# EAGLE board openSX70_SCHEMATIC_COMPLETE (EAGLE 8.4.3)
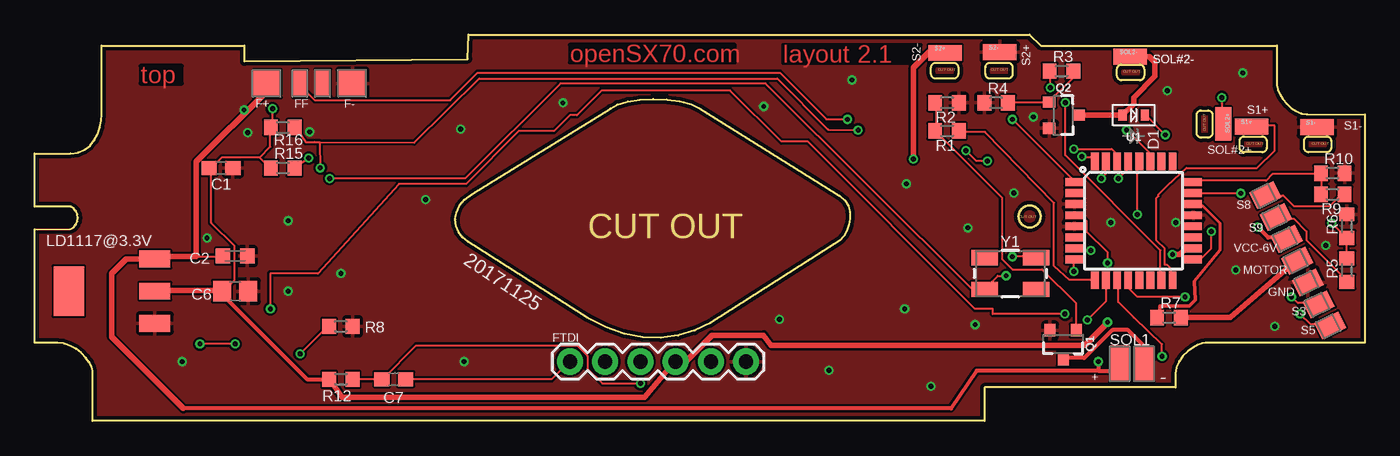
[diagram p0: board, top side]
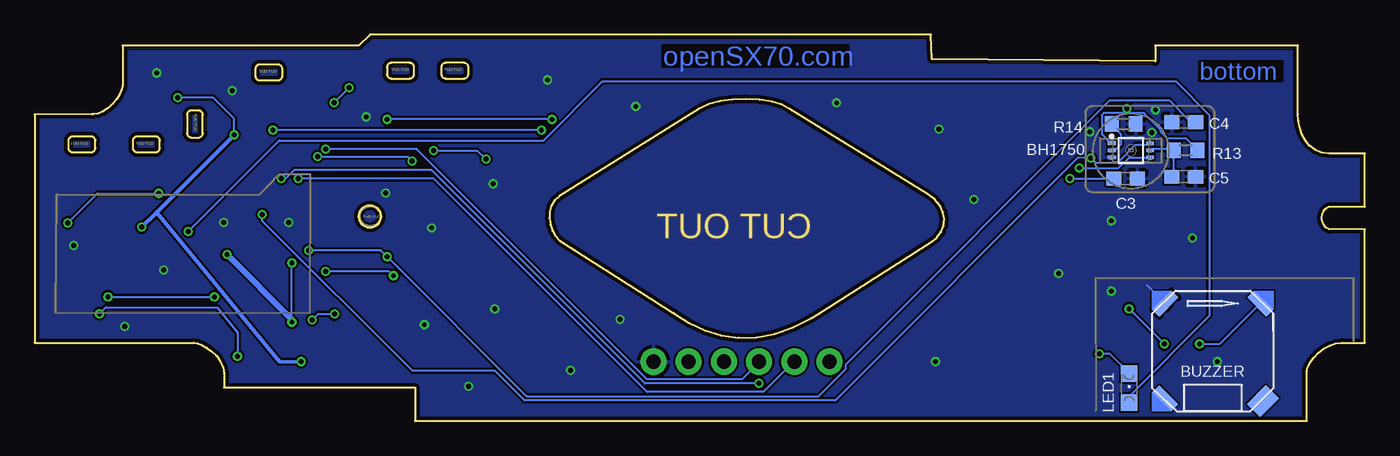
[diagram p1: board, bottom side, seen from below]

Size 95.88 x 27.86 mm. Coordinates in mm from the lower left corner, seen from the top.
Outline: 71.72,15.54 71.88,15.53 72.03,15.48 72.17,15.41 72.29,15.31
Outline: 72.29,15.31 72.39,15.19 72.46,15.06 72.51,14.91 72.52,14.74
Outline: 72.52,14.74 72.51,14.58 72.46,14.43 72.39,14.3 72.29,14.18
Outline: 72.29,14.18 72.17,14.08 72.03,14.01 71.88,13.96 71.72,13.94
Outline: 71.72,13.94 71.56,13.96 71.41,14.01 71.28,14.08 71.16,14.18
Outline: 71.16,14.18 71.06,14.3 70.99,14.43 70.94,14.58 70.92,14.74
Outline: 70.92,14.74 70.94,14.91 70.99,15.06 71.06,15.19 71.16,15.31
Outline: 71.16,15.31 71.28,15.41 71.41,15.48 71.56,15.53 71.72,15.54
Outline: 71.72,15.54 71.57,15.53 71.42,15.48 71.28,15.41 71.16,15.31
Outline: 71.16,15.31 71.06,15.19 70.98,15.05 70.94,14.9 70.92,14.74
Outline: 70.92,14.74 70.94,14.59 70.98,14.44 71.06,14.3 71.16,14.18
Outline: 71.16,14.18 71.28,14.08 71.42,14.01 71.57,13.96 71.72,13.94
Outline: 71.72,13.94 71.88,13.96 72.03,14.01 72.17,14.08 72.29,14.18
Outline: 72.29,14.18 72.39,14.3 72.46,14.44 72.51,14.59 72.52,14.74
Outline: 72.52,14.74 72.51,14.9 72.46,15.05 72.39,15.19 72.29,15.31
Outline: 72.29,15.31 72.17,15.41 72.03,15.48 71.88,15.53 71.72,15.54
Outline: 91.7,22.11 91.77,22.11 95.88,22.11 95.88,5.64 84.4,5.64 84.15,5.6 83.83,5.47 83.48,5.27 83.11,5.01 82.78,4.68 82.5,4.3 82.31,3.87 82.24,3.4 82.24,2.41 68.47,2.41 68.47,0 4.17,0 4.17,3.6 4.11,3.9 3.94,4.23 3.69,4.56 3.36,4.89 2.98,5.18 2.56,5.42 2.11,5.58 1.66,5.64 0,5.64 0,13.82 2.59,13.84 2.81,13.96 2.98,14.15 3.07,14.39 3.1,14.65 3.07,14.91 2.97,15.15 2.81,15.34 2.59,15.45 0,15.46 0,19.29 2.59,19.29 3.14,19.36 3.6,19.56 3.99,19.87 4.3,20.26 4.53,20.7 4.7,21.17 4.79,21.65 4.82,22.11 4.82,27.07 15.1,27.07 15.1,25.94 31.21,26.11 31.28,27.86 71.71,27.86 72.52,27.07 89.55,27.07 89.55,24.21 89.61,23.9 89.76,23.56 89.97,23.21 90.25,22.87 90.57,22.57 90.93,22.33 91.31,22.17 91.7,22.11
Outline: 83.76,20.77 83.76,22.06 83.77,22.12 83.79,22.19 83.82,22.24 83.86,22.29 83.91,22.33 83.96,22.36 84.03,22.38 84.09,22.39 84.57,22.39 84.64,22.38 84.7,22.36 84.76,22.33 84.81,22.29 84.85,22.24 84.88,22.19 84.9,22.12 84.9,22.06 84.9,20.77 84.9,20.7 84.88,20.64 84.85,20.58 84.81,20.53 84.76,20.49 84.7,20.46 84.64,20.44 84.57,20.44 84.09,20.44 84.03,20.44 83.96,20.46 83.91,20.49 83.86,20.53 83.82,20.58 83.79,20.64 83.77,20.7 83.76,20.77
Outline: 87.19,20.53 88.48,20.53 88.54,20.52 88.61,20.5 88.66,20.47 88.71,20.43 88.75,20.38 88.78,20.32 88.8,20.26 88.81,20.19 88.81,19.71 88.8,19.65 88.78,19.59 88.75,19.53 88.71,19.48 88.66,19.44 88.61,19.41 88.54,19.39 88.48,19.38 87.19,19.38 87.12,19.39 87.06,19.41 87,19.44 86.95,19.48 86.91,19.53 86.88,19.59 86.86,19.65 86.86,19.71 86.86,20.19 86.86,20.26 86.88,20.32 86.91,20.38 86.95,20.43 87,20.47 87.06,20.5 87.12,20.52 87.19,20.53
Outline: 91.84,20.53 93.13,20.53 93.2,20.52 93.26,20.5 93.32,20.47 93.37,20.43 93.41,20.38 93.44,20.32 93.46,20.26 93.46,20.19 93.46,19.71 93.46,19.65 93.44,19.59 93.41,19.53 93.37,19.48 93.32,19.44 93.26,19.41 93.2,19.39 93.13,19.38 91.84,19.38 91.78,19.39 91.71,19.41 91.66,19.44 91.61,19.48 91.57,19.53 91.54,19.59 91.52,19.65 91.51,19.71 91.51,20.19 91.52,20.26 91.54,20.32 91.57,20.38 91.61,20.43 91.66,20.47 91.71,20.5 91.78,20.52 91.84,20.53
Outline: 78.36,25.71 79.65,25.71 79.71,25.7 79.78,25.68 79.83,25.65 79.88,25.61 79.92,25.56 79.95,25.5 79.97,25.44 79.98,25.37 79.98,24.9 79.97,24.83 79.95,24.77 79.92,24.71 79.88,24.66 79.83,24.62 79.78,24.59 79.71,24.57 79.65,24.56 78.36,24.56 78.29,24.57 78.23,24.59 78.17,24.62 78.12,24.66 78.08,24.71 78.05,24.77 78.03,24.83 78.02,24.9 78.02,25.37 78.03,25.44 78.05,25.5 78.08,25.56 78.12,25.61 78.17,25.65 78.23,25.68 78.29,25.7 78.36,25.71
Outline: 68.87,25.84 70.16,25.84 70.23,25.83 70.29,25.81 70.35,25.78 70.39,25.74 70.43,25.69 70.47,25.63 70.49,25.57 70.49,25.51 70.49,25.03 70.49,24.96 70.47,24.9 70.43,24.84 70.39,24.79 70.35,24.75 70.29,24.72 70.23,24.7 70.16,24.69 68.87,24.69 68.8,24.7 68.74,24.72 68.68,24.75 68.64,24.79 68.59,24.84 68.56,24.9 68.54,24.96 68.54,25.03 68.54,25.51 68.54,25.57 68.56,25.63 68.59,25.69 68.64,25.74 68.68,25.78 68.74,25.81 68.8,25.83 68.87,25.84
Outline: 64.95,25.84 66.24,25.84 66.31,25.83 66.37,25.81 66.43,25.78 66.48,25.74 66.52,25.69 66.55,25.63 66.57,25.57 66.57,25.51 66.57,25.03 66.57,24.96 66.55,24.9 66.52,24.84 66.48,24.79 66.43,24.75 66.37,24.72 66.31,24.7 66.24,24.69 64.95,24.69 64.88,24.7 64.82,24.72 64.77,24.75 64.72,24.79 64.68,24.84 64.65,24.9 64.63,24.96 64.62,25.03 64.62,25.51 64.63,25.57 64.65,25.63 64.68,25.69 64.72,25.74 64.77,25.78 64.82,25.81 64.88,25.83 64.95,25.84
Outline: 31.52,16.35 41.5,22.53 42.01,22.82 42.74,23.03 43.62,23.16 44.59,23.21 45.57,23.18 46.5,23.06 47.32,22.84 47.95,22.53 58.05,16.23 58.41,15.9 58.64,15.51 58.76,15.07 58.78,14.61 58.71,14.16 58.56,13.73 58.34,13.34 58.06,13.03 49.78,7.77 48.71,7.05 47.57,6.51 46.38,6.16 45.13,5.99 43.84,6.03 42.53,6.28 41.2,6.75 39.87,7.45 31.22,12.93 30.83,13.23 30.55,13.62 30.37,14.06 30.32,14.55 30.4,15.04 30.62,15.52 30.99,15.97 31.52,16.35
Copper layers (1*16): Top 0.035mm / dielectric 1.5mm / Bottom 0.035mm
Design rules "SeeedStudio_2layer_DRU_no_angle_20140221": minimum track width 6mil, minimum drill 12mil, track to track 6mil, track to pad 6mil, pad to pad 6mil, via to via 6mil, smd to smd 0mil, copper to edge 10mil, drill to drill 10mil, minimum pad ring 10mil, minimum via ring 6mil, stop-mask expansion 2mil, vias tented up to drill 100mil, thermal gap 10mil

## Footprints (pad centres in the part's own frame; a part is rotated, then mirrored left to right if it is on the bottom)
SOTFL50P300X75-6N = smd 0.55 x 0.3: 1 -1.375,0.525 | smd 0.55 x 0.25: 2 -1.375,0; 3 -1.375,-0.5; 4 1.375,-0.5; 5 1.375,0; 6 1.375,0.5
CSET8-5G_PACKAGE = smd 1.9 x 0.7 rotated 225: + 3.054,-3.114 | smd 1.9 x 0.7 rotated 45: DUMMY1 -3.786,3.746 | smd 1.9 x 1.3 rotated 135: DUMMY2 -3.99,-3.29 | smd 1.9 x 0.7 rotated 315: GND- 3.051,3.742
0603 = smd 1.1 x 1: 1 -0.85,0; 2 0.85,0
C0603K = smd 1.05 x 1.08: 1 -0.875,0; 2 0.875,0
C0805 = smd 1.3 x 1.5: 1 -0.95,0; 2 0.95,0
SOD-523 = smd 0.8 x 0.6: A 0,-0.8; K 0,0.8
1X06 = drill 1.016 pad 1.88: 1 0,0; 2 2.54,0; 3 5.08,0; 4 7.62,0; 5 10.16,0; 6 12.7,0
SOT223 = smd 2.235 x 1.219: 1 -3.099,2.311; 2 -3.099,0; 3 -3.099,-2.311 | smd 2.2 x 3.6: 4 3.099,0
CHIPLED_0805 = smd 1.2 x 1.2: A 0,-1.05; C 0,1.05
SOT23-3 = smd 0.8 x 0.9: 1 -0.95,-1; 2 0.95,-1; 3 0,1.1
R0603 = smd 1 x 1.1: 1 -0.85,0; 2 0.85,0
SX70-S-PAD2 = smd 2.413 x 1.143: P$1 0.01,0.087
SX70-SOLENOID1-2 = smd 1.372 x 2.54: SOL1+ -0.826,0.127; SOL1- 0.953,0.127
TQFP32-08 = smd 1.27 x 0.559: 1 -4.293,2.8; 2 -4.293,2; 3 -4.293,1.2; 4 -4.293,0.4; 5 -4.293,-0.4; 6 -4.293,-1.2; 7 -4.293,-2; 8 -4.293,-2.8; 17 4.293,-2.8; 18 4.293,-2; 19 4.293,-1.2; 20 4.293,-0.4; 21 4.293,0.4; 22 4.293,1.2; 23 4.293,2; 24 4.293,2.8 | smd 0.559 x 1.27: 9 -2.8,-4.293; 10 -2,-4.293; 11 -1.2,-4.293; 12 -0.4,-4.293; 13 0.4,-4.293; 14 1.2,-4.293; 15 2,-4.293; 16 2.8,-4.293; 25 2.8,4.293; 26 2,4.293; 27 1.2,4.293; 28 0.4,4.293; 29 -0.4,4.293; 30 -1.2,4.293; 31 -2,4.293; 32 -2.8,4.293
SX70-7-PAD = smd 1.31 x 1.93 rotated 296: GND 3.404,0.495; MOTOR+ 2.654,2.07; S3 4.204,-1.067; S5 5.016,-2.591; S8 0.356,6.807; S9 1.118,5.232; VCC-6V 1.88,3.658
FFA-PAD-PACKAGE = smd 1.95 x 1.95: F+ -3.277,-0.013; F- 2.87,0 | smd 1.05 x 1.95: FF -0.914,0; FT 0.737,0.025
CRYSTAL-SMD-5X3.2-4PAD = smd 1.9 x 1.1: 1 -1.85,-1.15; 2 1.85,-1.15; 3 1.85,1.15; 4 -1.85,1.15

## Placement (x,y rotation side)
BH1750  BH1750FVI-TR  [SOTFL50P300X75-6N]  16.86,19.52 0 bottom
BUZZER  CSET8-5G  [CSET8-5G_PACKAGE]  10.64,5.42 90 bottom
C1  10uF  [0603]  13.44,18.25 180 top
C2  100nF  [C0603K]  14.45,11.9 180 top
C3  22pF  [0603]  17.25,17.48 180 bottom
C4  22pF  [0603]  13.05,21.55 0 bottom
C5  10uF  [0603]  13.05,17.61 0 bottom
C6  100nF  [C0805]  14.45,9.36 0 top
C7  0.1uF  [0603]  25.88,3.01 180 top
D1  [SOD-523]  79.22,22.06 270 top
FTDI  FTDI HEADER  [1X06]  38.58,4.28 0 top
LD11173.3V  LD1117 3.3V  [SOT223]  5.56,9.36 180 top
LED1  [CHIPLED_0805]  16.99,2.37 0 bottom
Q1  5.8A/30V/35mΩ  [SOT23-3]  74.14,5.55 180 top
Q2  5.8A/30V/35mΩ  [SOT23-3]  74.14,22.06 270 top
R1  100R  [R0603]  65.76,20.91 180 top
R2  100K  [R0603]  65.76,22.94 180 top
R3  100R  [R0603]  74.01,25.23 0 top
R4  100K  [R0603]  69.32,22.94 0 top
R5  12K  [R0603]  94.59,10.88 90 top
R6  15K  [R0603]  94.59,14.05 90 top
R7  100R  [R0603]  81.76,7.45 0 top
R8  470R  [R0603]  22.07,6.82 180 top
R9  12K  [R0603]  93.57,16.34 180 top
R10  15K  [R0603]  93.57,17.86 0 top
R12  10K  [R0603]  22.07,3.01 180 top
R13  1K  [R0603]  12.93,19.52 0 bottom
R14  4K7  [R0603]  17.37,21.42 0 bottom
R15  4K7  [R0603]  17.88,18.25 0 top
R16  4K7  [R0603]  17.88,21.17 0 top
S1+  SX70-S-PAD-NEW  [SX70-S-PAD2]  87.72,21.14 0 top
S1-  SX70-S-PAD-NEW  [SX70-S-PAD2]  92.42,21.09 0 top
S2+  SX70-S-PAD-NEW  [SX70-S-PAD2]  65.62,26.46 0 top
S2-  SX70-S-PAD-NEW  [SX70-S-PAD2]  69.56,26.51 0 top
SOL1  SX70-SOLENOID1-2PADS  [SX70-SOLENOID1-2]  79.03,4.05 0 top
SOL2+  SX70-S-PAD-NEW  [SX70-S-PAD2]  85.59,21.43 270 top
SOL2-  SX70-S-PAD-NEW  [SX70-S-PAD2]  78.96,26.19 0 top
U1  ATMEGA328P_TQFP  [TQFP32-08]  79.22,14.44 0 top
U$1  SX70-7-PAD  [SX70-7-PAD]  88.37,9.48 0 top
U$2  [FFA-PAD-PACKAGE]  20.04,24.34 0 top
Y1  16MHz  [CRYSTAL-SMD-5X3.2-4PAD]  70.33,10.63 0 top

## Library data of the parts
BH1750 = openSX70; AVAILABILITY: Good; DESCRIPTION: Light to Digital Ambient Light Sensor Digital O/P 1lux to 65535lux 6-Pin WSOF Embossed T/R; MF: Rohm; MP: BH1750FVI-TR; PACKAGE: SMD-6 Rohm; PRICE: 2.38 USD
BUZZER = CSET8-5G_B
C1 C5 = SparkFun-Capacitors; PROD_ID: CAP-11015
C2 = rcl
C3 C4 = SparkFun-Capacitors; PROD_ID: CAP-07876
C6 R1-R10 R12-R16 = resistor
C7 = SparkFun-Capacitors; PROD_ID: CAP-00810
D1 = adafruit
FTDI = SparkFun-Connectors
LD11173.3V = openSX70; AVAILABILITY: Unavailable; DESCRIPTION: Sot223/Pkg 1-Amp 5-Volt Low Drop Out Voltage Regulatator; MF: Advanced Monolithic Systems; MP: AMS1117-5.0; PACKAGE: None; PRICE: None
LED1 = led
Q1 Q2 = openSX70; PROD_ID: TRANS-12988
S1+ S1- S2+ S2- SOL1 SOL2+ SOL2- U$1 U$2 = openSX70
U1 = openSX70; PROD_ID: IC-09069
Y1 = SparkFun-Clocks; PROD_ID: XTAL-08218; SF_ID: COM-00094

## Nets
3.3V: BH1750.1 C1.2 C6.1 FTDI.4 LD11173.3V.2 R12.2 R13.2 R15.1 R16.1 U1.4 U1.6 U1.18
6V: C2.2 D1.K LD11173.3V.3 SOL1.SOL1+ SOL2+.P$1 U$1.VCC-6V U$2.F+
BUZZER: BUZZER.+ U1.10
DTR: C7.1 FTDI.1
FF: U1.1 U$2.FF
GND: BH1750.3 BUZZER.GND- C1.1 C2.1 C3.1 C4.1 C5.2 C6.2 FTDI.6 LD11173.3V.1 Q1.2 Q2.2 R2.1 R4.1 R6.2 R8.1 R10.2 R14.2 S1-.P$1 S2-.P$1 U1.3 U1.5 U1.21 U$1.GND U$2.F-
LED: LED1.A U1.17
MOTOR+: R7.1 U1.22
MOTOR-HEADER: R7.2 U$1.MOTOR+
N$1: Q1.1 R1.2 R2.2
N$2: BH1750.5 C5.1 R13.1
N$3: Q2.1 R3.2 R4.2
N$4: C4.2 U1.7 Y1.3
N$5: LED1.C R8.2
N$6: C3.2 U1.8 Y1.1
N$9: C7.2 R12.1 U1.29
N$10: BH1750.2 R14.1
RXD: FTDI.3 U1.30
S1: S1+.P$1 U1.16
S2: S2+.P$1 U1.32
S3: U1.12 U$1.S3
S5: U1.11 U$1.S5
S8@3.3V: R9.2 R10.1 U1.24
S8@6V: R9.1 U$1.S8
S9@3.3V: R5.2 R6.1 U1.23
S9@6V: R5.1 U$1.S9
SCL: BH1750.6 R15.2 U1.28
SDA: BH1750.4 R16.2 U1.27
SOL1: R1.1 U1.9
SOL1-: Q1.3 SOL1.SOL1-
SOL2: R3.1 U1.15
SOL2-: D1.A Q2.3 SOL2-.P$1
TXD: FTDI.2 U1.31

## Tracks (layer width: path | path; a pad name or v marks a point on that pad's centre or on a via)
3.3V  (via drill 0.35)
  Top 0.152: 12.72,18.25 13.49,19.01 16.23,19.01 | 16.23,19.01 16.99,18.25 R15.1 | 16.23,19.01 16.99,19.77 16.99,21.14 R16.1 17.14,21.29 v17.14,22.51 | 13.38,9.25 C6.1 | 8.76,9.41 LD11173.3V.2 | 13.49,9.41 C6.1 | 12.72,18.25 12.72,14.28 14.4,12.61 14.4,10.17 13.64,9.41 C6.1 | 12.72,18.25 C1.2 | 75.82,13.67 75.51,13.37 75.06,13.37 U1.6 | 75.82,13.67 75.82,14.44 75.51,14.74 75.06,14.74 U1.4 | 82.83,12.3 83.44,12.3 U1.18 | 46.25,4.38 FTDI.4 46.1,4.22 | 75.82,13.67 77.34,12.15 v77.34,11.39 | 21.26,3.01 R12.2
  Top 0.305: R12.2 19.63,3.01 13.38,9.25 | 77.36,7.12 v77.34,7.12 | 46.25,4.38 47.01,4.38 | v82.02,11.99 v82.02,12
  Top 0.406: 13.49,9.41 8.76,9.41 | 82.83,12.3 82.52,12 v82.02,12 | 77.36,7.12 75.68,5.44 53.09,5.45 52.55,6.18 48.82,6.18 47.01,4.38 | 21.26,3.01 22.17,1.71 43.97,1.71 46.1,4.22
  Bottom 0.152: 17.14,22.21 15.92,22.21 14.71,20.99 14.71,20.84 14.25,20.38 12.88,20.38 12.11,19.62 R13.2 | 17.14,22.21 18.82,22.21 18.97,22.06 18.97,20.68 18.36,20.07 BH1750.1 | v17.14,22.51 17.14,22.21 | v77.34,7.12 v77.34,11.39
  Bottom 0.305: 77.34,7.32 v77.34,7.12
  Bottom 0.406: v82.02,12 77.34,7.32
6V  (via drill 0.35)
  Top 0.152: 11.66,11.84 13.49,11.84 C2.2 | 8.91,11.84 8.76,11.69 LD11173.3V.3 8.61,11.54 | 16.69,23.73 16.69,24.19 U$2.F+ | v81.51,20.63 80.09,22.06 D1.K | 90.14,13.22 U$1.VCC-6V | 78.26,4.22 SOL1.SOL1+ 78.1,4.07 77.65,3.62 | v85.57,23.33 85.57,21.53 SOL2+.P$1
  Top 0.305: v88.16,13.98 88.92,13.22 90.14,13.22 | 78.26,4.3 78.26,4.22 | 10.72,0.9 66.06,0.9 67.89,3.62 76.68,3.62 | 76.68,3.62 77.65,3.62 | v76.68,4.28 76.68,3.62
  Top 0.406: 8.91,11.84 11.66,11.84 11.66,18.7 16.69,23.73 | LD11173.3V.3 6.6,11.67 5.56,10.63 5.56,6.05 10.72,0.9
  Bottom 0.152: v81.51,20.63 81.51,21.8 83.03,23.33 v85.57,23.33
  Bottom 0.305: v88.16,13.98 87.1,15.05 | 87.1,15.05 v81.51,20.63 | 87.1,15.05 78.26,4.3 v76.68,4.28
BUZZER  (via drill 0.35)
  Top 0.152: U1.10 77.22,8.63 v75.88,7.28 | v74.27,7.7 69.06,7.7 69.06,8.09 67.79,8.09 55.73,20.15 53.82,20.15 50.14,23.83 40.87,23.83 39.09,22.06 38.58,22.06 37.44,20.91 34.9,20.91 31.09,17.1 26.26,17.1 20.42,10.63 16.99,10.63 v16.99,8.09 | v14.45,5.55 v11.91,5.55
  Bottom 0.152: v75.88,7.28 75.46,7.7 v74.27,7.7 | v11.91,5.55 10.45,5.55 BUZZER.+ | v16.99,8.09 v14.45,5.55
DTR
  Top 0.152: C7.1 37.26,3.01 38.48,4.22 FTDI.1
FF  (via drill 0.35)
  Top 0.152: v70.48,21.75 74.9,17.33 U1.1 | v58.6,21.75 57.07,21.75 53.72,25.1 31.93,25.1 29.95,23.12 20.19,23.12 19.13,24.19 U$2.FF
  Bottom 0.152: v58.6,21.75 v70.48,21.75
GND  (via drill 0.35)
  Bottom 0.152: BUZZER.GND- 14.4,8.49 15.7,9.8 14.3,8.39
  other vias: 10.64,4.28 22.07,10.63 62.71,8.09 53.69,7.32 30.71,21.04 62.84,17.1 28.17,15.96 30.96,4.28 57.25,3.64 67.79,6.94 86.59,10.88 87.1,25.1 93.06,12.66 81.63,23.83 58.9,24.6 38.07,22.94 52.55,22.69 77.57,14.31 71.98,21.93 18.26,9.36 82.27,14.31 15.34,20.79 15.09,22.44 19.82,20.85 89.38,6.82 64.62,2.5 18.26,14.44 70.59,16.44 12.42,13.2 67.28,13.93
  pour Top (isolate 0.152): 91.7,22.11 91.77,22.11 95.88,22.11 95.88,5.64 84.4,5.64 84.15,5.6 83.83,5.47 83.48,5.27 83.11,5.01 82.78,4.68 82.5,4.3 82.31,3.87 82.24,3.4 82.24,2.41 68.47,2.41 68.47,0 4.17,0 4.17,3.6 4.11,3.9 3.94,4.23 3.69,4.56 3.36,4.89 2.98,5.18 2.56,5.42 2.11,5.58 1.66,5.64 0,5.64 0,13.82 2.59,13.84 2.81,13.96 2.98,14.15 3.07,14.39 3.1,14.65 3.07,14.91 2.97,15.15 2.81,15.34 2.59,15.45 0,15.46 0,19.29 2.59,19.29 3.14,19.36 3.6,19.56 3.99,19.87 4.3,20.25 4.53,20.7 4.7,21.17 4.79,21.65 4.82,22.11 4.82,27.07 15.1,27.07 15.1,25.94 31.21,26.11 31.28,27.86 71.71,27.86 72.52,27.07 89.55,27.07 89.55,24.21 89.61,23.9 89.76,23.56 89.97,23.21 90.25,22.87 90.57,22.57 90.93,22.33 91.31,22.17
  pour Bottom (isolate 0.152): 91.7,22.11 91.77,22.11 95.88,22.11 95.88,5.64 84.4,5.64 84.15,5.6 83.83,5.47 83.48,5.27 83.11,5.01 82.78,4.68 82.5,4.3 82.31,3.87 82.24,3.4 82.24,2.41 68.47,2.41 68.47,0 4.17,0 4.17,3.6 4.11,3.9 3.94,4.23 3.69,4.56 3.36,4.89 2.98,5.18 2.56,5.42 2.11,5.58 1.66,5.64 0,5.64 0,13.82 2.59,13.84 2.81,13.96 2.98,14.15 3.07,14.39 3.1,14.65 3.07,14.91 2.97,15.15 2.81,15.34 2.59,15.45 0,15.46 0,19.29 2.59,19.29 3.14,19.36 3.6,19.56 3.99,19.87 4.3,20.25 4.53,20.7 4.7,21.17 4.79,21.65 4.82,22.11 4.82,27.07 15.1,27.07 15.1,25.94 31.21,26.11 31.28,27.86 71.71,27.86 72.52,27.07 89.55,27.07 89.55,24.21 89.61,23.9 89.76,23.56 89.97,23.21 90.25,22.87 90.57,22.57 90.93,22.33 91.31,22.17
LED  (via drill 0.35)
  Top 0.152: v84.81,13.67 84.81,12.45 84.05,11.69 83.59,11.69 U1.17
  Bottom 0.152: LED1.A 16.99,1.79 11.2,7.58 11.2,22.06 13.64,24.49 54.94,24.49 59.21,20.23 78.26,20.23 v84.81,13.67
MOTOR+
  Top 0.152: 84.2,15.5 83.59,15.5 U1.22 | 81.12,7.4 R7.1
  Top 0.203: 83.59,10.06 85.42,12.3 85.42,14.28 84.2,15.5
  Top 0.254: 83.59,10.06 83.67,8.72 83.23,8.28 81.09,8.28 81.12,7.4
MOTOR-HEADER
  Top 0.152: 90.91,11.54 U$1.MOTOR+
  Top 0.406: 90.91,11.54 86.18,7.45 R7.2
N$1
  Top 0.152: Q1.1 75.06,6.66 75.06,8.49 72.62,10.93 70.48,10.93 69.72,11.69 69.72,16.11 65,20.84 R1.2 65,20.99 65,22.82 R2.2
N$2
  Bottom 0.152: BH1750.5 15.47,19.62 13.79,19.62 R13.1 13.79,19.46 13.79,17.64 C5.1
N$3
  Top 0.152: R3.2 74.75,25.1 74.75,24.65 73.23,23.12 Q2.1 73.07,22.97 70.18,22.97 R4.2
N$4  (via drill 0.35)
  Top 0.152: v70.48,11.84 72.16,11.84 Y1.3 | v76.12,12.3 75.06,12.3 U1.7
  Bottom 0.152: C4.2 12.27,21.6 12.57,21.6 14.1,23.12 18.36,23.12 37.41,4.07 37.41,3.77 39.39,1.79 60.43,1.79 v70.48,11.84 70.94,12.3 v76.12,12.3
N$5  (via drill 0.35)
  Top 0.152: v19.13,4.83 21.11,6.82 R8.2
  Bottom 0.152: v19.13,4.83 18.36,4.83 16.99,3.46 LED1.C
N$6  (via drill 0.35)
  Top 0.152: v21.26,17.48 31.01,17.48 37.9,24.34 52.68,24.34 67.62,9.46 Y1.1 68.5,9.56 69.42,10.47 v70.03,10.47 | v74.9,10.78 74.9,11.54 U1.8
  Bottom 0.152: v21.26,17.48 C3.2 | v74.9,10.78 70.33,10.78 v70.03,10.47
N$7
  pour Top: 71.72,15.54 71.88,15.53 72.03,15.48 72.17,15.41 72.29,15.31 72.39,15.19 72.46,15.06 72.51,14.91 72.52,14.74 72.51,14.58 72.46,14.43 72.39,14.3 72.29,14.18 72.17,14.08 72.03,14.01 71.88,13.96 71.72,13.94 71.56,13.96 71.41,14.01 71.28,14.08 71.16,14.18 71.06,14.3 70.99,14.43 70.94,14.58 70.92,14.74 70.94,14.91 70.99,15.06 71.06,15.19 71.16,15.31 71.28,15.41 71.41,15.48 71.56,15.53
N$8
  pour Top: 83.76,20.77 83.76,22.06 83.77,22.12 83.79,22.19 83.82,22.24 83.86,22.29 83.91,22.33 83.96,22.36 84.03,22.38 84.09,22.39 84.57,22.39 84.64,22.38 84.7,22.36 84.76,22.33 84.81,22.29 84.85,22.24 84.88,22.19 84.9,22.12 84.9,22.06 84.9,20.77 84.9,20.7 84.88,20.64 84.85,20.58 84.81,20.53 84.76,20.49 84.7,20.46 84.64,20.44 84.57,20.44 84.09,20.44 84.03,20.44 83.96,20.46 83.91,20.49 83.86,20.53 83.82,20.58 83.79,20.64 83.77,20.7
N$9  (via drill 0.35)
  Top 0.152: R12.1 C7.2 25.07,3.01 27.51,5.44 39.09,5.44 39.85,4.68 39.85,3.77 40.92,2.7 v43.66,2.7 | v78.1,17.48 78.71,18.09 78.71,18.7 U1.29
  Bottom 0.152: v78.1,17.48 77.8,17.48 77.19,18.09 67.28,18.09 51.89,2.7 v43.66,2.7
N$10
  Bottom 0.152: BH1750.2 18.21,19.62 17.91,19.62 17.6,19.92 17.6,20.68 18.21,21.29 R14.1
N$11
  pour Top: 87.19,20.53 88.48,20.53 88.54,20.52 88.61,20.5 88.66,20.47 88.71,20.43 88.75,20.38 88.78,20.32 88.8,20.26 88.81,20.19 88.81,19.71 88.8,19.65 88.78,19.59 88.75,19.53 88.71,19.48 88.66,19.44 88.61,19.41 88.54,19.39 88.48,19.38 87.19,19.38 87.12,19.39 87.06,19.41 87,19.44 86.95,19.48 86.91,19.53 86.88,19.59 86.86,19.65 86.86,19.71 86.86,20.19 86.86,20.26 86.88,20.32 86.91,20.38 86.95,20.43 87,20.47 87.06,20.5 87.12,20.52
N$12
  pour Top: 91.84,20.53 93.13,20.53 93.2,20.52 93.26,20.5 93.32,20.47 93.37,20.43 93.41,20.38 93.44,20.32 93.46,20.26 93.46,20.19 93.46,19.71 93.46,19.65 93.44,19.59 93.41,19.53 93.37,19.48 93.32,19.44 93.26,19.41 93.2,19.39 93.13,19.38 91.84,19.38 91.78,19.39 91.71,19.41 91.66,19.44 91.61,19.48 91.57,19.53 91.54,19.59 91.52,19.65 91.51,19.71 91.51,20.19 91.52,20.26 91.54,20.32 91.57,20.38 91.61,20.43 91.66,20.47 91.71,20.5 91.78,20.52
N$13
  pour Top: 78.36,25.71 79.65,25.71 79.71,25.7 79.78,25.68 79.83,25.65 79.88,25.61 79.92,25.56 79.95,25.5 79.97,25.44 79.98,25.37 79.98,24.9 79.97,24.83 79.95,24.77 79.92,24.71 79.88,24.66 79.83,24.62 79.78,24.59 79.71,24.57 79.65,24.56 78.36,24.56 78.29,24.57 78.23,24.59 78.17,24.62 78.12,24.66 78.08,24.71 78.05,24.77 78.03,24.83 78.02,24.9 78.02,25.37 78.03,25.44 78.05,25.5 78.08,25.56 78.12,25.61 78.17,25.65 78.23,25.68 78.29,25.7
N$14
  pour Top: 68.87,25.84 70.16,25.84 70.23,25.83 70.29,25.81 70.35,25.78 70.39,25.74 70.44,25.69 70.47,25.63 70.49,25.57 70.49,25.5 70.49,25.03 70.49,24.96 70.47,24.9 70.44,24.84 70.39,24.79 70.35,24.75 70.29,24.72 70.23,24.7 70.16,24.69 68.87,24.69 68.8,24.7 68.74,24.72 68.69,24.75 68.64,24.79 68.6,24.84 68.56,24.9 68.55,24.96 68.54,25.03 68.54,25.5 68.55,25.57 68.56,25.63 68.6,25.69 68.64,25.74 68.69,25.78 68.74,25.81 68.8,25.83
N$16
  pour Top: 64.95,25.84 66.24,25.84 66.31,25.83 66.37,25.81 66.43,25.78 66.48,25.74 66.52,25.69 66.55,25.63 66.57,25.57 66.57,25.5 66.57,25.03 66.57,24.96 66.55,24.9 66.52,24.84 66.48,24.79 66.43,24.75 66.37,24.72 66.31,24.7 66.24,24.69 64.95,24.69 64.89,24.7 64.82,24.72 64.77,24.75 64.72,24.79 64.68,24.84 64.65,24.9 64.63,24.96 64.62,25.03 64.62,25.5 64.63,25.57 64.65,25.63 64.68,25.69 64.72,25.74 64.77,25.78 64.82,25.81 64.89,25.83
N$17
  pour Top: 31.52,16.35 41.5,22.53 42.01,22.82 42.74,23.03 43.62,23.16 44.59,23.21 45.57,23.18 46.5,23.05 47.32,22.84 47.96,22.53 58.05,16.23 58.41,15.9 58.64,15.51 58.77,15.07 58.78,14.61 58.71,14.16 58.56,13.73 58.34,13.34 58.06,13.03 49.78,7.76 48.71,7.05 47.57,6.51 46.38,6.16 45.13,5.99 43.85,6.03 42.53,6.28 41.2,6.75 39.87,7.45 31.22,12.93 30.83,13.23 30.55,13.62 30.37,14.06 30.32,14.55 30.4,15.04 30.62,15.52 30.99,15.97
N$18
  pour Bottom: 71.72,15.54 71.88,15.53 72.03,15.48 72.17,15.41 72.29,15.31 72.39,15.19 72.46,15.06 72.51,14.91 72.52,14.74 72.51,14.58 72.46,14.43 72.39,14.3 72.29,14.18 72.17,14.08 72.03,14.01 71.88,13.96 71.72,13.94 71.56,13.96 71.41,14.01 71.28,14.08 71.16,14.18 71.06,14.3 70.99,14.43 70.94,14.58 70.92,14.74 70.94,14.91 70.99,15.06 71.06,15.19 71.16,15.31 71.28,15.41 71.41,15.48 71.56,15.53
N$19
  pour Bottom: 83.76,20.77 83.76,22.06 83.77,22.12 83.79,22.19 83.82,22.24 83.86,22.29 83.91,22.33 83.96,22.36 84.03,22.38 84.09,22.39 84.57,22.39 84.64,22.38 84.7,22.36 84.76,22.33 84.81,22.29 84.85,22.24 84.88,22.19 84.9,22.12 84.9,22.06 84.9,20.77 84.9,20.7 84.88,20.64 84.85,20.58 84.81,20.53 84.76,20.49 84.7,20.46 84.64,20.44 84.57,20.44 84.09,20.44 84.03,20.44 83.96,20.46 83.91,20.49 83.86,20.53 83.82,20.58 83.79,20.64 83.77,20.7
N$20
  pour Bottom: 87.19,20.53 88.48,20.53 88.54,20.52 88.61,20.5 88.66,20.47 88.71,20.43 88.75,20.38 88.78,20.32 88.8,20.26 88.81,20.19 88.81,19.71 88.8,19.65 88.78,19.59 88.75,19.53 88.71,19.48 88.66,19.44 88.61,19.41 88.54,19.39 88.48,19.38 87.19,19.38 87.12,19.39 87.06,19.41 87,19.44 86.95,19.48 86.91,19.53 86.88,19.59 86.86,19.65 86.86,19.71 86.86,20.19 86.86,20.26 86.88,20.32 86.91,20.38 86.95,20.43 87,20.47 87.06,20.5 87.12,20.52
N$21
  pour Bottom: 91.84,20.53 93.13,20.53 93.2,20.52 93.26,20.5 93.32,20.47 93.37,20.43 93.41,20.38 93.44,20.32 93.46,20.26 93.46,20.19 93.46,19.71 93.46,19.65 93.44,19.59 93.41,19.53 93.37,19.48 93.32,19.44 93.26,19.41 93.2,19.39 93.13,19.38 91.84,19.38 91.78,19.39 91.71,19.41 91.66,19.44 91.61,19.48 91.57,19.53 91.54,19.59 91.52,19.65 91.51,19.71 91.51,20.19 91.52,20.26 91.54,20.32 91.57,20.38 91.61,20.43 91.66,20.47 91.71,20.5 91.78,20.52
N$22
  pour Bottom: 78.36,25.71 79.65,25.71 79.71,25.7 79.78,25.68 79.83,25.65 79.88,25.61 79.92,25.56 79.95,25.5 79.97,25.44 79.98,25.37 79.98,24.9 79.97,24.83 79.95,24.77 79.92,24.71 79.88,24.66 79.83,24.62 79.78,24.59 79.71,24.57 79.65,24.56 78.36,24.56 78.29,24.57 78.23,24.59 78.17,24.62 78.12,24.66 78.08,24.71 78.05,24.77 78.03,24.83 78.02,24.9 78.02,25.37 78.03,25.44 78.05,25.5 78.08,25.56 78.12,25.61 78.17,25.65 78.23,25.68 78.29,25.7
N$23
  pour Bottom: 68.87,25.84 70.16,25.84 70.23,25.83 70.29,25.81 70.35,25.78 70.39,25.74 70.44,25.69 70.47,25.63 70.49,25.57 70.49,25.5 70.49,25.03 70.49,24.96 70.47,24.9 70.44,24.84 70.39,24.79 70.35,24.75 70.29,24.72 70.23,24.7 70.16,24.69 68.87,24.69 68.8,24.7 68.74,24.72 68.69,24.75 68.64,24.79 68.6,24.84 68.56,24.9 68.55,24.96 68.54,25.03 68.54,25.5 68.55,25.57 68.56,25.63 68.6,25.69 68.64,25.74 68.69,25.78 68.74,25.81 68.8,25.83
N$24
  pour Bottom: 64.95,25.84 66.24,25.84 66.31,25.83 66.37,25.81 66.43,25.78 66.48,25.74 66.52,25.69 66.55,25.63 66.57,25.57 66.57,25.5 66.57,25.03 66.57,24.96 66.55,24.9 66.52,24.84 66.48,24.79 66.43,24.75 66.37,24.72 66.31,24.7 66.24,24.69 64.95,24.69 64.89,24.7 64.82,24.72 64.77,24.75 64.72,24.79 64.68,24.84 64.65,24.9 64.63,24.96 64.62,25.03 64.62,25.5 64.63,25.57 64.65,25.63 64.68,25.69 64.72,25.74 64.77,25.78 64.82,25.81 64.89,25.83
N$25
  pour Bottom: 31.52,16.35 41.5,22.53 42.01,22.82 42.74,23.03 43.62,23.16 44.59,23.21 45.57,23.18 46.5,23.05 47.32,22.84 47.96,22.53 58.05,16.23 58.41,15.9 58.64,15.51 58.77,15.07 58.78,14.61 58.71,14.16 58.56,13.73 58.34,13.34 58.06,13.03 49.78,7.76 48.71,7.05 47.57,6.51 46.38,6.16 45.13,5.99 43.85,6.03 42.53,6.28 41.2,6.75 39.87,7.45 31.22,12.93 30.83,13.23 30.55,13.62 30.37,14.06 30.32,14.55 30.4,15.04 30.62,15.52 30.99,15.97
RXD  (via drill 0.35)
  Top 0.152: v74.9,19.62 77.65,19.62 77.95,19.31 77.95,18.86 U1.30
  Bottom 0.152: v74.9,19.62 68.35,19.62 51.74,3.01 44.88,3.01 43.66,4.22 FTDI.3
S1
  Top 0.152: S1+.P$1 87.8,21.29 89.38,21.29 89.38,19.52 88.11,18.25 83.03,18.25 81.63,16.98 81,16.34 81,16.21 80.87,16.09 80.87,13.01 81.46,12.43 81.46,11.26 81.63,11.26 81.89,11.01 81.89,10.28 U1.16
S2  (via drill 0.35)
  Top 0.152: U1.32 76.14,19.01 75.67,19.01 75.61,19.06 v75.49,19.06 | v68.68,18.75 67.87,18.75 v67.13,19.49 | 64.49,26.63 64.57,26.55
  Top 0.406: v63.35,18.88 63.35,25.48 64.49,26.63 | 64.57,26.55 S2+.P$1
  Bottom 0.152: v75.49,19.06 68.99,19.06 v68.68,18.75 | v67.13,19.49 64.01,19.49 v63.35,18.88
S3  (via drill 0.35)
  Top 0.152: v82.92,8.95 79.48,8.95 78.87,9.56 78.87,10.02 U1.12 | v90.6,8.95 91.06,8.49 92.43,8.49 U$1.S3
  Bottom 0.152: v90.6,8.95 v82.92,8.95
S5  (via drill 0.35)
  Top 0.152: v81.27,4.66 81.25,5.52 79.22,7.45 78.1,8.57 78.1,10.02 U1.11 | v91.21,7.73 91.97,6.97 93.34,6.97 U$1.S5
  Bottom 0.152: v91.21,7.73 90.75,8.19 82.71,8.18 81.25,6.34 v81.27,4.66
S8@3.3V
  Top 0.152: R9.2 92.73,16.42 92.73,17.79 R10.1 92.58,17.79 89.23,17.79 88.77,17.33 83.59,17.33 U1.24
S8@6V
  Top 0.152: R9.1 94.41,16.26 94.11,16.26 93.34,15.5 90.75,15.5 89.99,16.26 88.77,16.26 U$1.S8
S9@3.3V  (via drill 0.35)
  Top 0.152: R5.2 94.56,11.84 94.56,13.06 R6.1 94.56,13.22 v93.5,14.28 | v86.94,16.42 83.59,16.42 U1.23
  Bottom 0.152: v86.94,16.42 91.36,16.42 v93.5,14.28
S9@6V
  Top 0.152: R5.1 94.56,10.17 91.67,13.06 91.67,13.67 90.75,14.59 89.53,14.59 U$1.S9
SCL  (via drill 0.35)
  Top 0.152: v19.76,18.96 19.13,18.55 18.82,18.25 R15.2 | v79.48,14.89 79.48,18.7 U1.28
  Bottom 0.152: BH1750.6 15.62,19.92 16.53,19.92 17.81,18.65 19.44,18.65 19.53,18.73 v19.76,18.96 20.7,18.99 38.18,1.48 60.58,1.48 62.71,3.62 68.66,3.62 79.48,14.44 v79.48,14.89
SDA  (via drill 0.35)
  Top 0.152: 20.55,20.11 v20.59,18.25 | 20.55,20.11 20.16,20.12 19.53,20.12 18.82,21.14 R16.2 | v78.71,20.99 80.39,19.31 80.39,18.86 U1.27 | v59.36,20.99 57.19,21.02 53.54,24.7 32.05,24.7 27.35,20.07 20.55,20.11
  Bottom 0.152: v20.59,18.25 19.28,18.25 17.75,18.25 16.99,19.01 15.62,19.01 BH1750.4 | v59.36,20.99 v78.71,20.99
SOL1
  Top 0.152: R1.1 66.67,20.84 68.5,20.84 73.48,15.73 73.48,11.16 74.6,10.17 76.28,10.17 U1.9
SOL1-
  Top 0.152: 79.93,5.44 79.93,4.22 SOL1.SOL1- | 74.14,4.53 Q1.3
  Top 0.305: 74.14,4.53 75.67,4.53 77.7,6.56 78.82,6.56 79.93,5.44
SOL2  (via drill 0.35)
  Top 0.152: v73.23,24.04 73.23,25.1 R3.1 | v74.29,22.97 74.29,19.16 81.15,12.3 81.15,10.17 U1.15
  Bottom 0.152: v74.29,22.97 v73.23,24.04
SOL2-
  Top 0.152: 80.75,24.85 80.75,25.87
  Top 0.406: Q2.3 D1.A 79.22,22.86 79.22,23.33 80.75,24.85 80.75,25.87 80.34,26.27 SOL2-.P$1
TXD  (via drill 0.35)
  Top 0.152: v76.88,17.48 77.19,17.79 77.19,18.7 U1.31
  Bottom 0.152: v76.88,17.48 67.13,17.48 51.74,2.09 43.36,2.09 41.22,4.22 FTDI.2

## Text on the board
Top: openSX70.com | layout 2.1 | top
Bottom: openSX70.com | bottom
Dimension: CUT OUT | CUT OUT | CUT OUT | CUT OUT | CUT OUT | CUT OUT | CUT OUT | CUT OUT
tPlace: S2- | SOL#2- | SOL#2- | S2+ | F+ | FF | F- | S1+ | S1- | SOL#2+ | S8 | S9 | LD1117@3.3V | VCC-6V | MOTOR | 20171125 | GND | S3 | S5 | + | -